# Altium PCB EnvMonitor V1.0a.PcbDoc
Units mil, origin at the board's own origin, x right, y up, seen from the top; angles counter-clockwise.
Board outline 2165.35 x 1968.5 mil, 2 copper layers (Top Layer, Bottom Layer); 164 components, 96 nets, 453 pads, 285 vias.
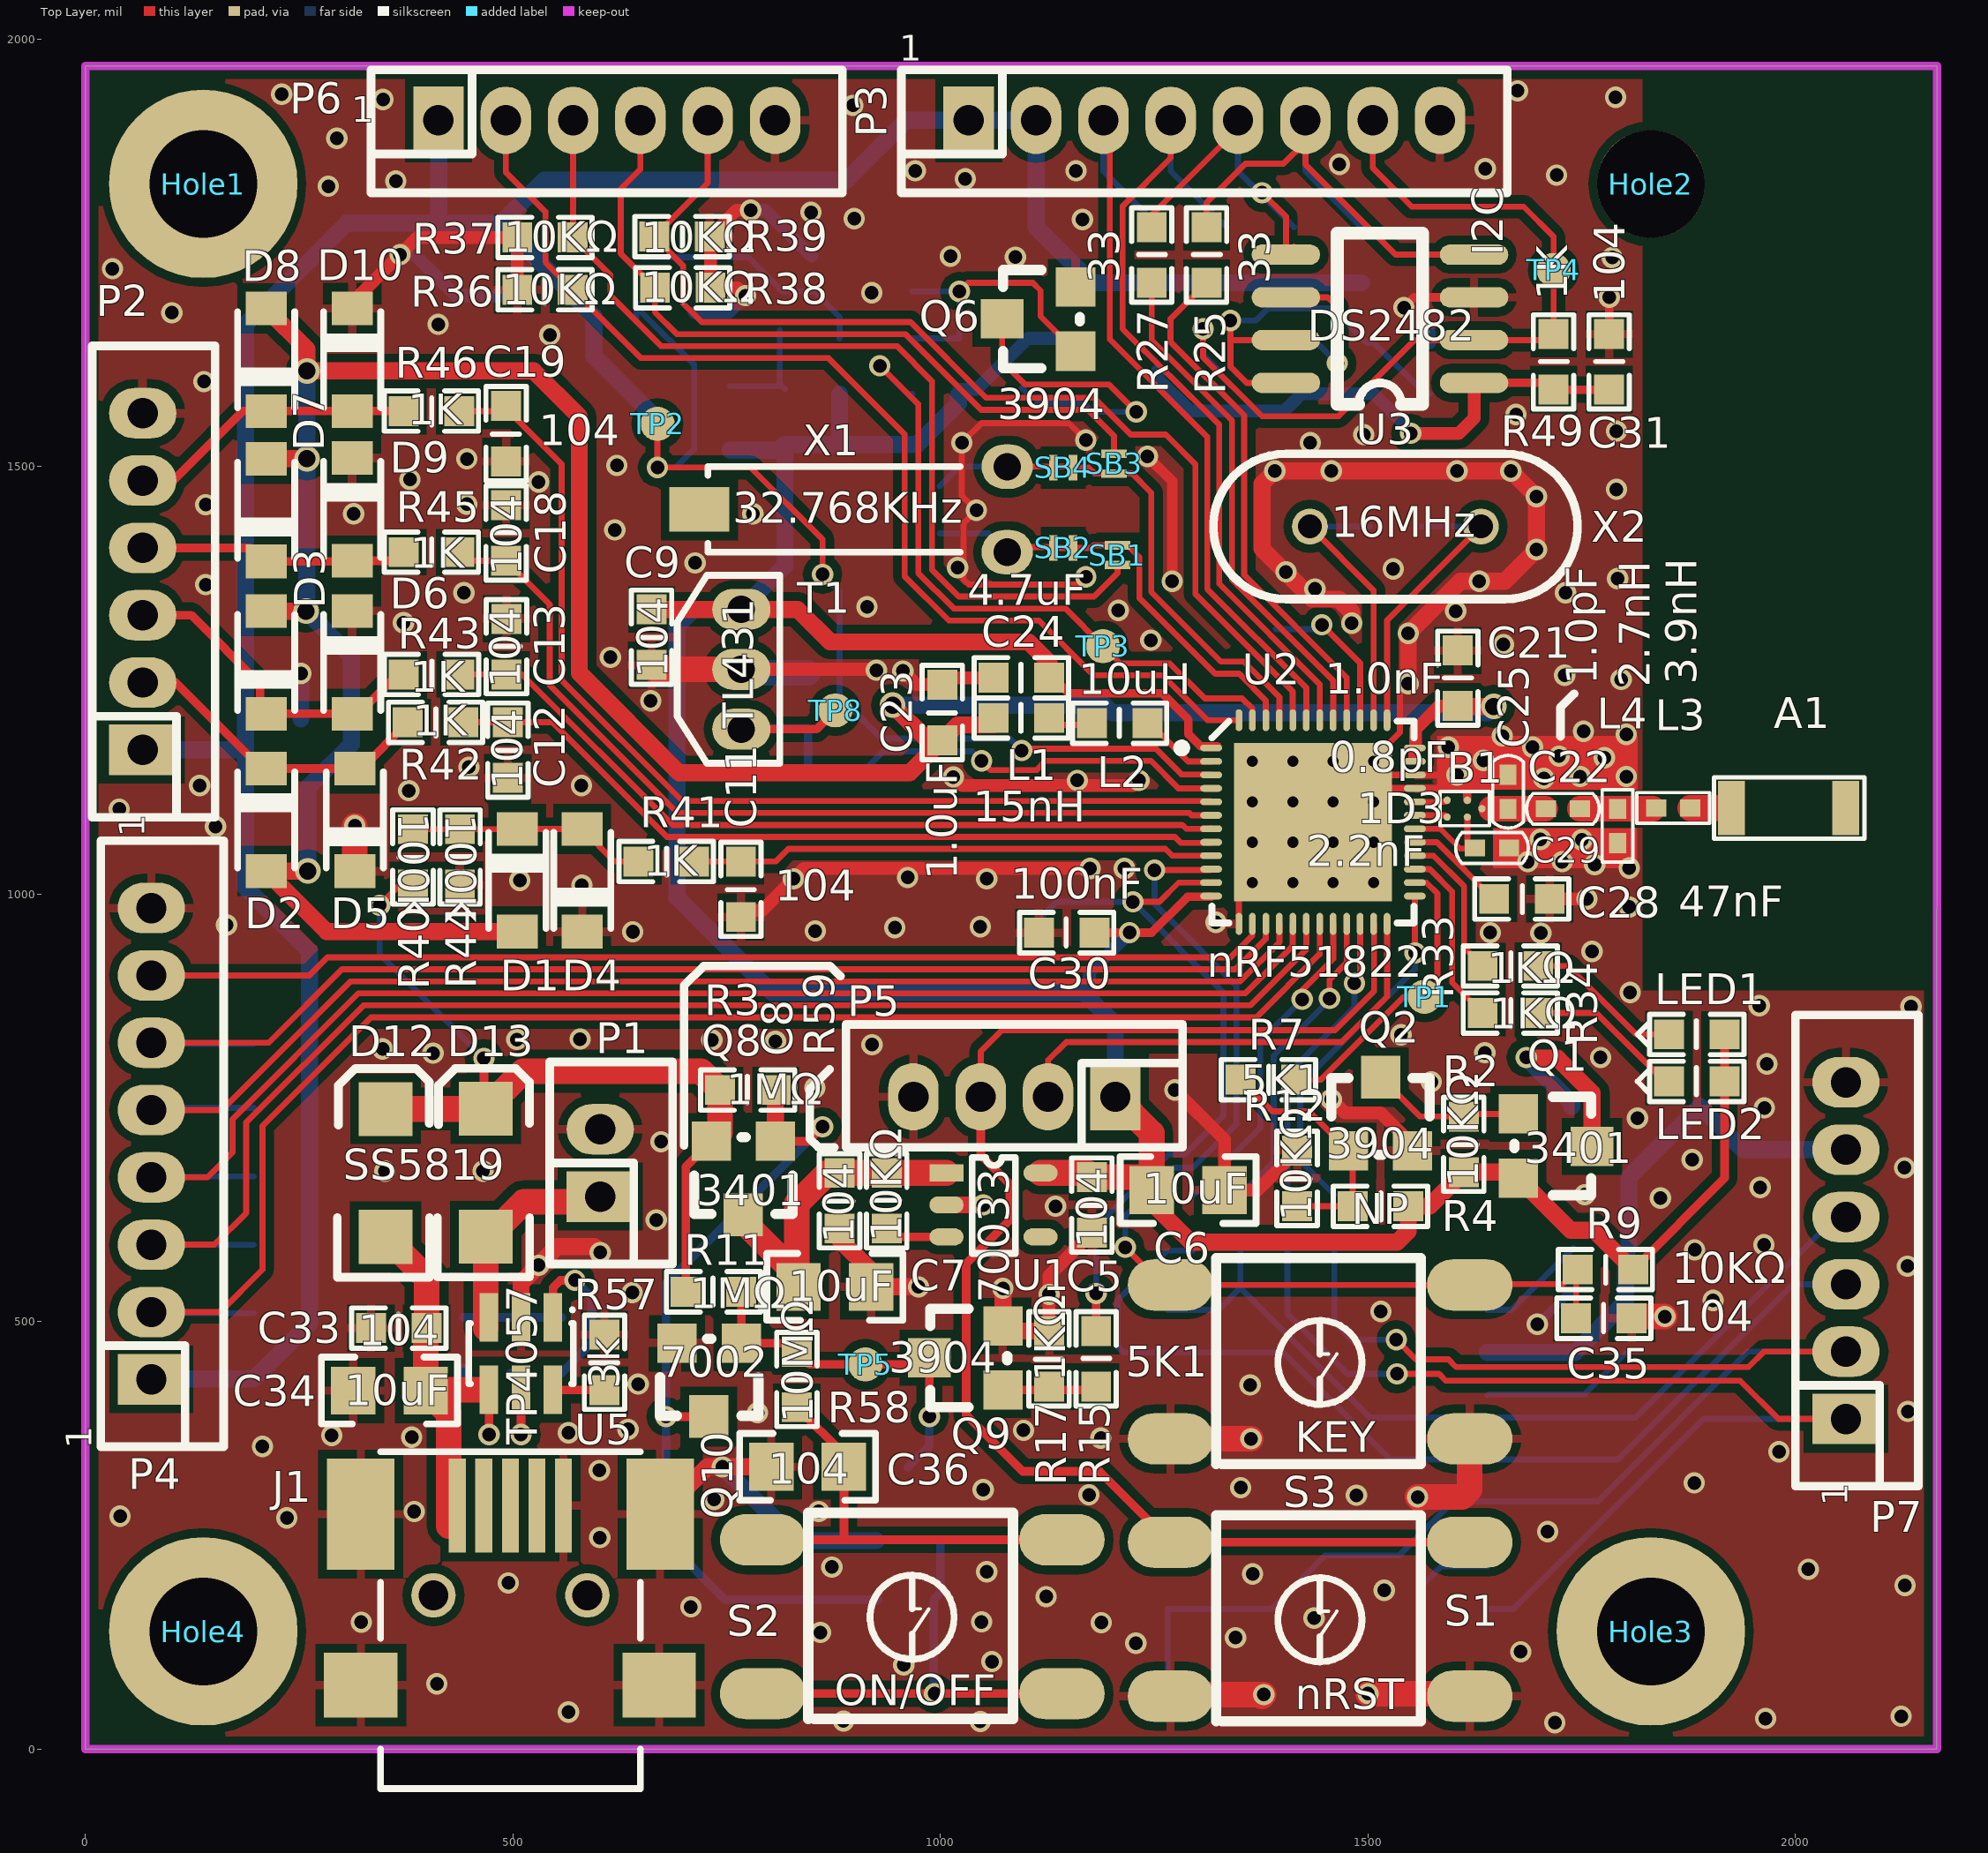
[diagram p0: Top Layer view]
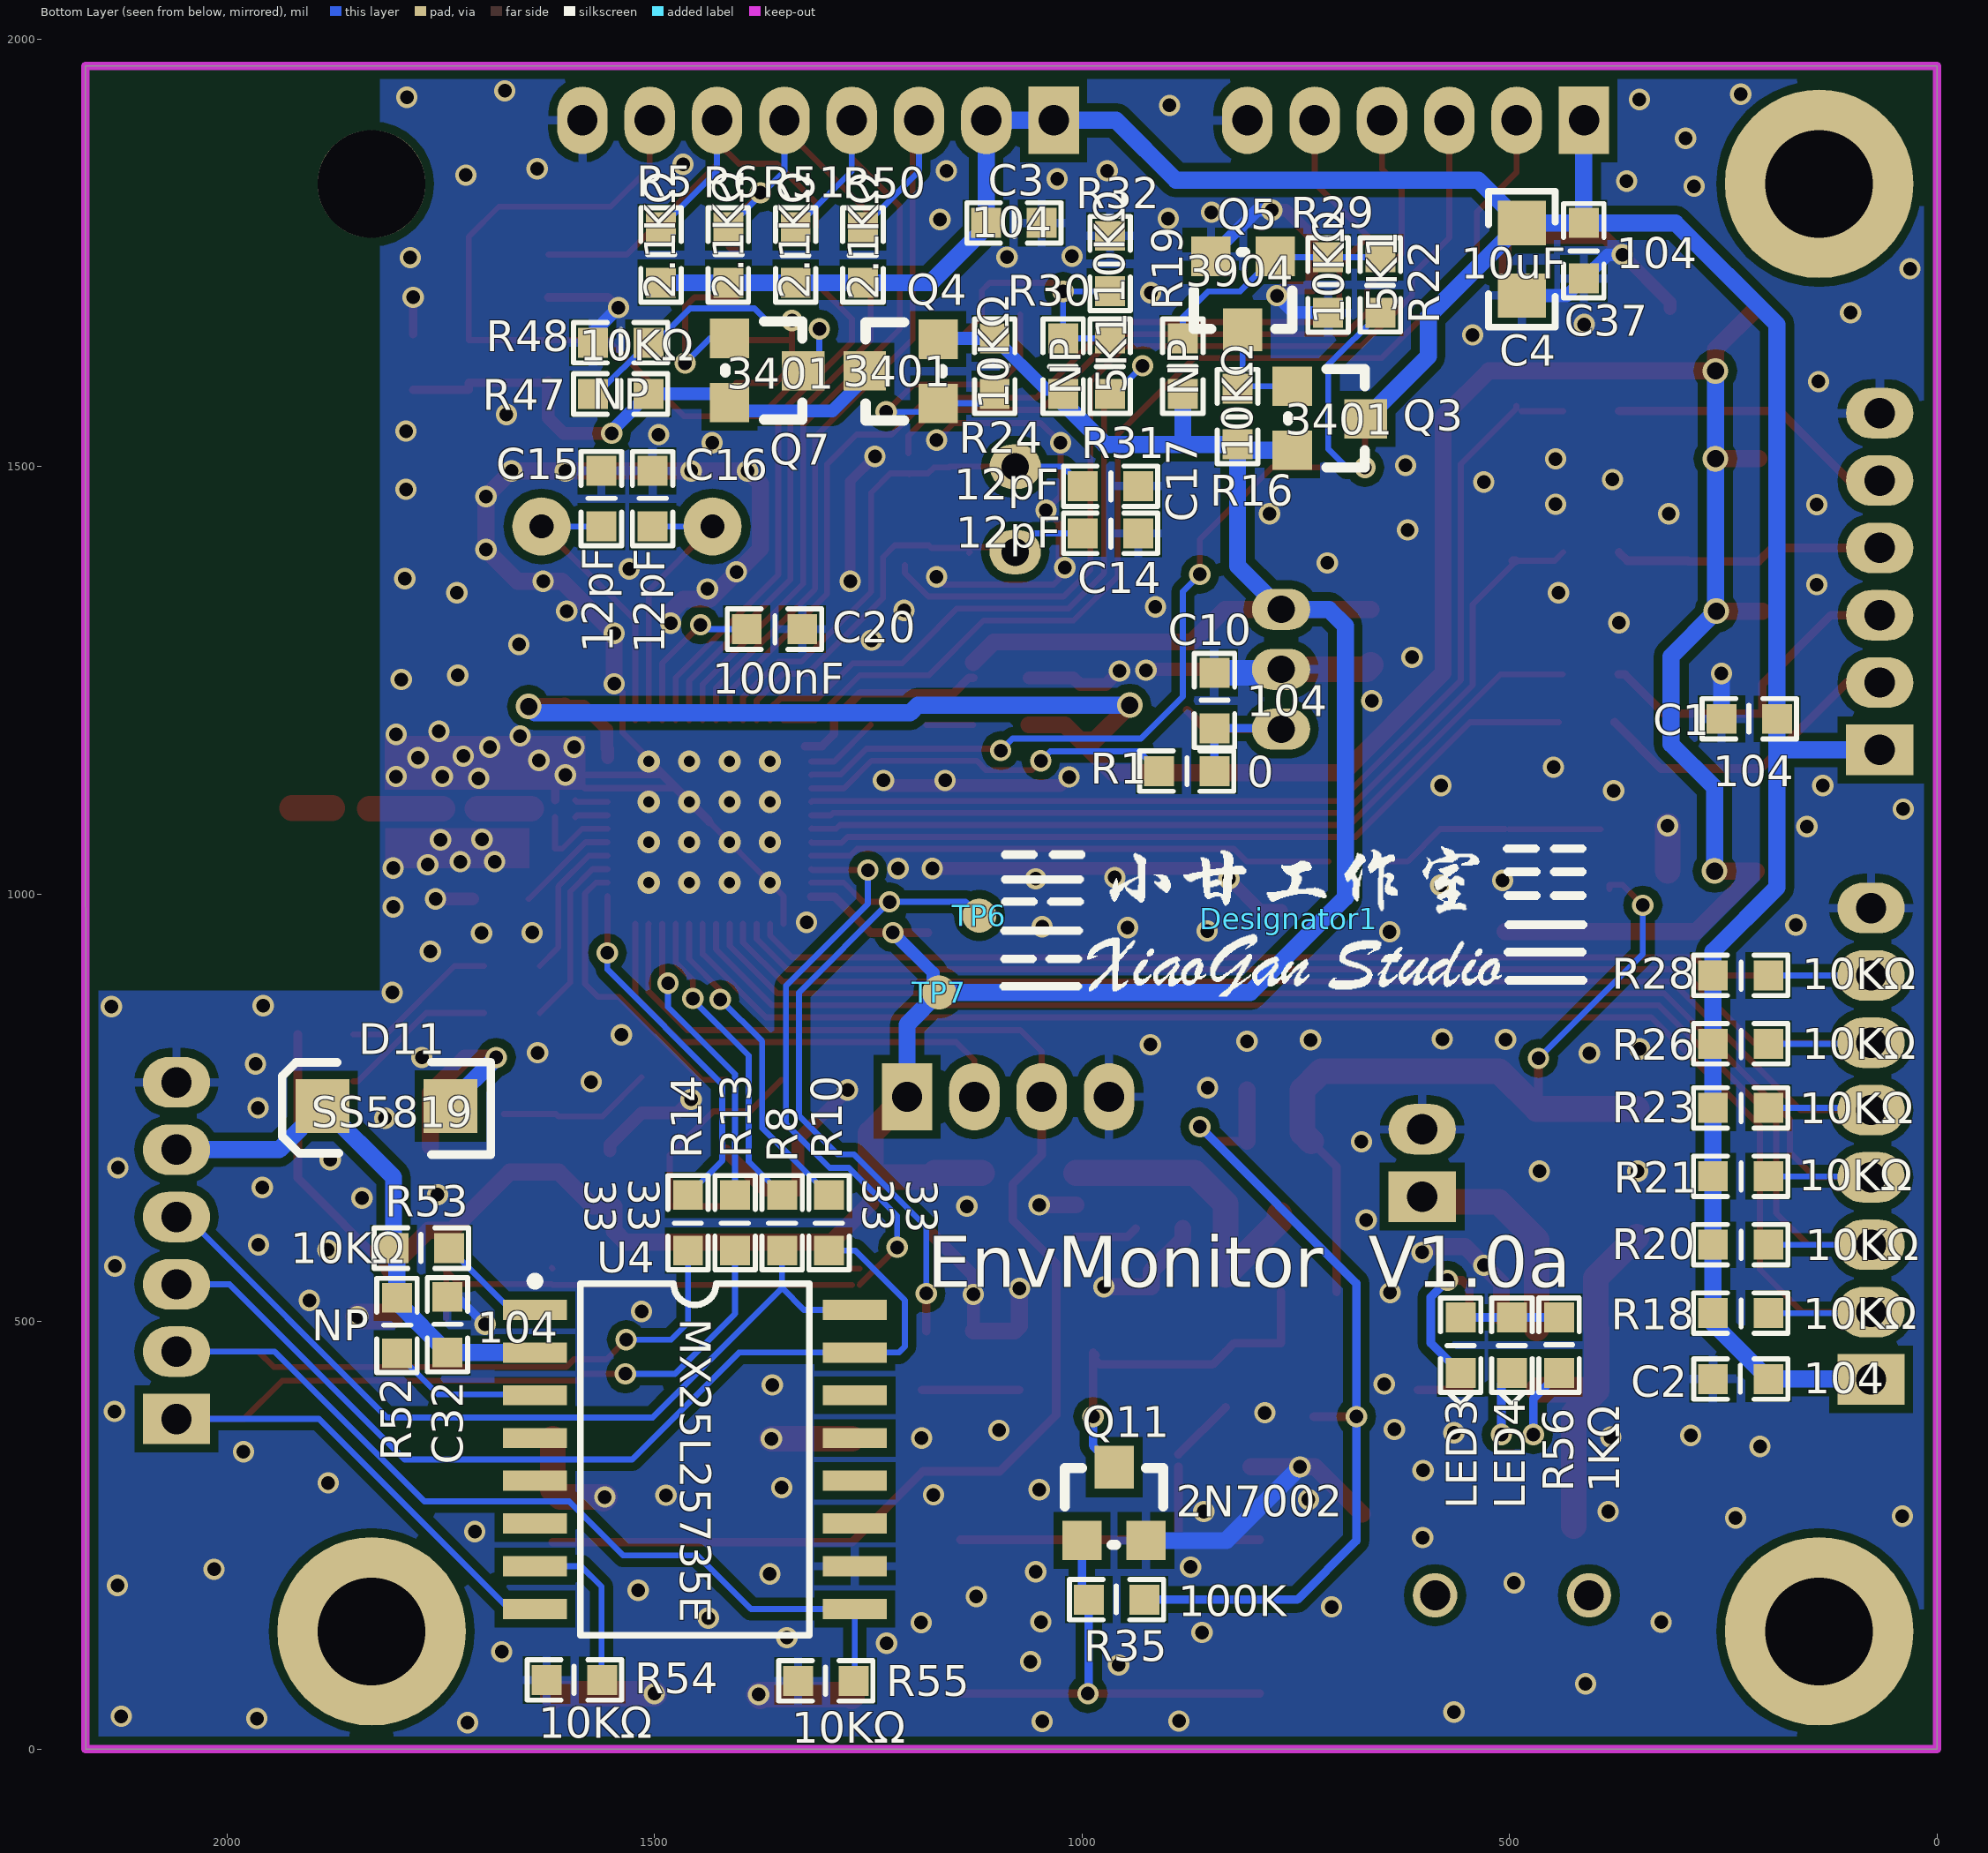
[diagram p1: Bottom Layer view, seen from below]

## Layer stack, top to bottom
Top Layer: signal copper 1.4
Dielectric: dielectric 12.6, FR-4, Dk 4.8
Bottom Layer: signal copper 1.4

## Board outline
0,0 2165,0 2165.35,1968.5 0,1968.5

## Design rules (kind name [scope] priority, off if disabled: settings)
Clearance Clearance_RF [(InNetClass('RF')) vs INPOLY] p1: gap=6
Clearance Clearance_POLY [INPOLY] p2: gap=10
Clearance Clearance_1 [All] p3: gap=7
ComponentClearance [All] p1 off: gap=10 collisioncheckmode=3 verticalgap=10 showdistances=FALSE
DiffPairsRouting [All] p1 off: maxlimit=10 minlimit=10 mostfreqgap=10 maxuncoupledlength=500
FanoutControl Fanout_BGA [IsBGA] p1 off: bgadir=Out bgaviamode=Centered fanoutstyle=Auto fanoutdirection=Alternating viagrid=1 // Fanout_BGA (Default Rule)
FanoutControl Fanout_LCC [IsLCC] p2 off: bgadir=Out bgaviamode=Centered fanoutstyle=Auto fanoutdirection=Alternating viagrid=1 // Fanout_LCC (Default Rule)
FanoutControl Fanout_SOIC [IsSOIC] p3 off: bgadir=Out bgaviamode=Centered fanoutstyle=Auto fanoutdirection=Alternating viagrid=1 // Fanout_SOIC (Default Rule)
FanoutControl Fanout_Small [(CompPinCount < 5)] p4 off: bgadir=Out bgaviamode=Centered fanoutstyle=Auto fanoutdirection=OutThenIn viagrid=1 // Fanout_Small (Default Rule)
FanoutControl Fanout_Default [All] p5 off: bgadir=Out bgaviamode=Centered fanoutstyle=Auto fanoutdirection=Alternating viagrid=1 // Fanout_Default (Default Rule)
Height [All] p1 off: minheight=0 maxheight=1000 prefheight=500
HoleSize [All] p1: absolutevalues=TRUE maxlimit=150 minlimit=1 maxpercent=80.000 minpercent=20.000
HoleToHoleClearance [All] p1 off: gap=10 allowstackedmicrovias=TRUE
MinimumSolderMaskSliver [All] p1 off: minsoldermaskwidth=10
PasteMaskExpansion [All] p1 off: expansion=0
PolygonConnect PolygonConnect_VIA [ISVIA] p1: connectstyle=Direct reliefconductorwidth=10 reliefentries=4 polygonreliefangle="90 Angle"
PolygonConnect [All] p2: connectstyle=Relief reliefconductorwidth=10 reliefentries=4 polygonreliefangle="90 Angle"
RoutingVias [All] p1: holewidth=28 width=50 viastyle="Through Hole" minholewidth=10 minwidth=10 maxholewidth=28 maxwidth=50
SilkToSilkClearance [All] p1 off: silktosilkclearance=10
SilkscreenOverComponentPads [All] p1 off: minsilkscreentomaskgap=10
SolderMaskExpansion [All] p1 off: expansion=4
Width [All] p1: maxlimit=100 minlimit=7 preferedwidth=7
14 further rules are at their usual default settings.

## Classes and differential pairs
net class RF: ANT1 ANT2 NetB1_B1 NetC22_2

## Components (designator, comment, footprint, x,y, rotation, side; value= is the part's Value field where it differs from the comment)
A1 "2450AT18A100" 3*7 2058.74,1100.75 r180 top (schematic designator ANT1)
B1 "1D3" BAL-ST-WLCSP 1592.51,1090.2 r0 top
C1 "104" 0603R 187,1205 r0 bottom
C2 "104" 0603R 197,433 r0 bottom
C3 "104" 0603R 1112,1785 r180 bottom
C4 "10uF" 0805R 485.26,1785 r270 bottom
C5 "104" 0603R 1177,669 r270 top
C6 "10uF" 0805R 1247.05,654.25 r0 top
C7 "10uF" 0805R 834,541 r0 top
C8 "104" 0603R 882,674 r270 top
C9 "104" 0603R 662,1333 r270 top
C10 "104" 0603R 845,1194 r90 bottom
C11 "104" 0603R 766.62,1038.24 r270 top
C12 "104" 0603R 494,1201 r270 top
C13 "104" 0603R 492.35,1257 r90 top
C14 "12pF" 0603R 999,1422 r180 bottom
C15 "12pF" 0603R 1562,1430 r90 bottom
C16 "12pF" 0603R 1502,1430 r90 bottom
C17 "12pF" 0603R 999,1477 r180 bottom
C18 "104" 0603R 492,1390 r90 top
C19 "104" 0603R 492,1571 r270 top
C20 "100nF" 0603R 1392,1310 r180 bottom
C21 "1.0nF" 0603R 1605,1220 r90 top
C22 "1.0pF" 0402C 1707.88,1099.75 r0 top
C23 "1.0uF" 0603R 1002,1245 r270 top
C24 "4.7uF" 0603R 1127,1253 r180 top
C25 "0.8pF" 0402C 1663.85,1139.75 r270 top (schematic designator C22)
C28 "47nF" 0603R 1647.42,994.42 r0 top
C29 "2.2nF" 0402C 1625,1054 r0 top
C30 "100nF" 0603R 1180,955 r180 top
C31 "104" 0603R 1782,1590 r90 top
C32 "104" 0603R 1742,464 r90 bottom
C33 "104" 0603R 399,492.5 r180 top
C34 "10uF" 0805R 397.95,419.24 r180 top
C35 "104" 0603R 1808.31,504 r180 top
C36 "104" 0805R 887,330 r180 top
C37 "104" 0603R 413,1785 r270 bottom
D1 "1N4148" SOD-123 505,1076.24 r270 top
D2 "1N4148" SOD-123 211.35,1147 r270 top
D3 "1N4148" SOD-123 211.35,1211 r90 top
D4 "1N4148" SOD-123 581,956.24 r90 top
D5 "1N4148" SOD-123 315,1027 r90 top
D6 "1N4148" SOD-123 312,1331 r270 top
D7 "1N4148" SOD-123 211.35,1389.2 r90 top
D8 "1N4148" SOD-123 211.35,1565 r90 top
D9 "1N4148" SOD-123 312,1510 r270 top
D10 "1N4148" SOD-123 312,1685 r270 top
D11 "SS5819" SMA 1813.2,752 r0 bottom
D12 "SS5819" SMA 351,674 r90 top
D13 "SS5819" SMA 468,674.2 r90 top
Designator1 "Comment" BMP1 758,971.5 r180 bottom
Hole1 "" HOLE-3.2#1 137.8,1830.71 r0 top
Hole2 "" HOLE-3.2#2 2027.56,1830.71 r0 top
Hole3 "" HOLE-3.2#3 2027.56,137.8 r0 top
Hole4 "" HOLE-3.2#1 137.8,137.8 r0 top
J1 "USB_COM-MicroUSB" USB_MINIB_SMT 435,285 r90 top
L1 "15nH" 0603R 1127,1206 r180 top
L2 "10uH" 0603R 1242,1200 r180 top
L3 "3.9nH" 0402R 1836.88,1100.75 r0 top
L4 "2.7nH" 0402R 1791.88,1059.75 r90 top
LED1 "LED_0603" LED-0603 1917,836 r180 top
LED2 "LED_0603" LED-0603 1917,781 r180 top
LED3 "LED-0805" LED-0603 557,505 r270 bottom
LED4 "LED-0805" LED-0603 497,505 r270 bottom
P1 "Li-BAT" CON2-2.0 602,646.26 r270 top
P2 "ADC x 4" CON6-2.0 67,1168.78 r90 top
P3 "I2C" CON8-2.0 1033,1905 r180 top locked
P4 "IO" CON8-2.0 77,432.56 r270 top
P5 "SWD" CON4-2.0 1204.48,763 r0 top locked
P6 "IO" CON6-2.0 412.82,1905 r0 top locked
P7 "Flash" CON6-2.0 2058.86,386.26 r90 top
Q1 "3401" SOT-23 1676,743 r270 top
Q2 "3904" SOT-23 1477,700 r0 top
Q3 "3401" SOT-23 754,1594 r270 bottom
Q4 "3401" SOT-23 1168,1574 r90 bottom
Q5 "3904" SOT-23 774,1746 r0 bottom
Q6 "3904" SOT-23 1158,1635 r90 top
Q7 "3401" SOT-23 1412,1650 r270 bottom
Q8 "3401" SOT-23 807,711 r180 top
Q9 "3904" SOT-23 1073,420 r90 top
Q10 "7002" SOT-23 767,475 r180 top
Q11 "2N7002" SOT-23 1000,244 r180 bottom
R1 "0" 0603R 910,1144 r180 bottom
R2 "10KΩ" 0603R 1612,740 r270 top
R3 "1MΩ" 0603R 807,771 r180 top
R4 "NP" 0603R 1482,635 r0 top
R5 "2.1KΩ" 0603R 1492.25,1715.01 r90 bottom
R6 "2.1KΩ" 0603R 1413.5,1715.01 r90 bottom
R7 "5K1" 0603R 1351,783 r0 top
R8 "33" 0603R 1350.62,648.24 r270 bottom
R9 "10KΩ" 0603R 1745,561 r0 top
R10 "33" 0603R 1295.62,648.24 r270 bottom
R11 "1MΩ" 0603R 767,535 r180 top
R12 "10KΩ" 0603R 1417,700 r270 top
R13 "33" 0603R 1405.62,648.24 r270 bottom
R14 "33" 0603R 1460.62,648.24 r270 bottom
R15 "5K1" 0603R 1182,424 r90 top
R16 "10KΩ" 0603R 818,1591 r270 bottom
R17 "1KΩ" 0603R 1127,489 r270 top
R18 "10KΩ" 0603R 262,510 r180 bottom
R19 "NP" 0603R 882,1650 r270 bottom
R20 "10KΩ" 0603R 262,590 r180 bottom
R21 "10KΩ" 0603R 262,670 r180 bottom
R22 "5K1" 0603R 651,1745 r270 bottom
R23 "10KΩ" 0603R 262,750 r180 bottom
R24 "10KΩ" 0603R 1102,1585 r90 bottom
R25 "33" 0603R 1311.13,1715 r90 top
R26 "10KΩ" 0603R 262,825 r180 bottom
R27 "33" 0603R 1247,1715 r90 top
R28 "10KΩ" 0603R 262,905 r180 bottom
R29 "10KΩ" 0603R 712,1680 r90 bottom
R30 "NP" 0603R 1022,1650 r270 bottom
R31 "5K1" 0603R 967,1650 r270 bottom
R32 "10KΩ" 0603R 967,1770 r270 bottom
R33 "1KΩ" 0603R 1634,916 r0 top
R34 "1KΩ" 0603R 1634,861 r0 top
R35 "100K" 0603R 927,175 r0 bottom
R36 "10KΩ" 0603R 570,1706.9 r180 top
R37 "10KΩ" 0603R 570,1768 r180 top
R38 "10KΩ" 0603R 666,1709.26 r0 top
R39 "10KΩ" 0603R 665.26,1769 r0 top
R40 "100K" 0603R 383,1076 r270 top
R41 "1K" 0603R 646.62,1038.24 r0 top
R42 "1K" 0603R 377,1201 r0 top
R43 "1K" 0603R 372.35,1257 r0 top
R44 "100K" 0603R 438,1011 r90 top
R45 "1K" 0603R 372,1400 r0 top
R46 "1K" 0603R 372,1565 r0 top
R47 "NP" 0603R 1572,1585 r180 bottom
R48 "10KΩ" 0603R 1572,1645 r180 bottom
R49 "1K" 0603R 1717,1590 r90 top
R50 "2.1KΩ" 0603R 1256,1780 r270 bottom
R51 "2.1KΩ" 0603R 1334.75,1780 r270 bottom
R52 "NP" 0603R 1801,463 r90 bottom
R53 "10KΩ" 0603R 1740,586 r0 bottom
R54 "10KΩ" 0603R 1561,81 r0 bottom
R55 "10KΩ" 0603R 1267,80 r0 bottom
R56 "1KΩ" 0603R 442,440 r90 bottom
R57 "3k" 0603R 607,485 r270 top
R58 "10MΩ" 0603R 832,465 r270 top
R59 "10KΩ" 0603R 937,609 r90 top
S1 "nRST" KEY-6S 1444,152 r0 top locked
S2 "ON/OFF" KEY-6S 967,155 r0 top
S3 "KEY" KEY-6S 1444,453 r0 top
SB1 "Solderbridge" SOLDERBRIDGE 1207,1408 r270 top (schematic designator SB3)
SB2 "Solderbridge" SOLDERBRIDGE_SHORTED 1132,1405 r0 top net-tie (schematic designator SB4)
SB3 "Solderbridge" SOLDERBRIDGE 1203,1492 r90 top
SB4 "Solderbridge" SOLDERBRIDGE_SHORTED 1132,1499 r0 top net-tie
T1 "TL431" TL-431 767,1333 r0 top
TP1 "" MARKER-C#1 1566,880 r0 top
TP2 "" MARKER-C#1 669,1550 r0 top
TP3 "" MARKER-C#1 1190,1290 r0 top
TP4 "" MARKER-C#1 1717,1730 r90 top
TP5 "" MARKER-C#1 912,450 r270 top
TP6 "" MARKER-C#2 1120,975 r270 bottom
TP7 "" MARKER-C#2 1167,885 r180 bottom
TP8 "" MARKER-C#1 877,1215 r90 top
U1 "70033" SOT-23-5 1007,674 r0 top
U2 "nRF51822" QFN40P600X600X90-48N 1435.62,1084.38 r0 top locked
U3 "DS2482" SO-8 1624,1598 r180 top
U4 "MX25L25735E" SOIC16W 1453,339.47 r270 bottom
U5 "TP4057" SOT23-6 509.4,462.68 r0 top
X1 "32.768KHz" CRY-32 1078,1500 r180 top
X2 "16MHz" XTAL-D 1432,1430 r0 top

## Footprints (in the part's own frame and the unit in brackets; to place one, negate y for a bottom-side part, rotate by r counter-clockwise, add the part's x,y. Pads: shape width x height; smd on the part's side, far side on the other; paste and mask are expansions set on the pad)
3*7 [mm]
  rect 0.8x1.6 smd: 1(0,0) 2(3.4,0)
  silkscreen extent -0.56,-0.91 3.91,0.91
0402C [mm]
  rect 0.6x0.5 smd: 1(0,0) 2(1.016,0)
  silkscreen extent -0.57,-0.46 1.59,0.46
0402R [mm]
  rect 0.6x0.5 smd: 1(0,0) 2(1.016,0)
  silkscreen extent -0.57,-0.46 1.59,0.46
0603R [mil]
  rect 35x35 smd: 1(0,0) 2(65,0)
  silkscreen extent -23,-24 88,24
0805R [mil]
  rect 52x56 smd: 1(-0.05,-0.25) 2(84.95,-0.25)
  silkscreen extent -37,-39 122,39
BAL-ST-WLCSP [mm]
  round 0.22 smd mask+0.05: A2(0.6,0.5) A3(0,0.5) B1(1.033,0.25) C2(0.6,0) C3(0,0)
  Top Layer pour cut-out: -0.19,-0.23 1.256,-0.23 1.256,0.737 -0.19,0.737
  silkscreen extent -0.22,-0.26 1.26,0.75, body extent -0.2,-0.23 1.26,0.74, height 0.63
BMP1 [mil]
  silkscreen extent -338,-91 349,86
CON2-2.0 [mm]
  rect 1.5x2 hole 0.9: 1(0,0)
  oval 1.5x2 hole 0.9: 2(-2,0)
  silkscreen extent -4,-1.5 2,2.15, body extent -4,-1.55 2,2.1, height 5.55
CON4-2.0 [mm]
  rect 1.5x2 hole 0.9: 1(0,0)
  oval 1.5x2 hole 0.9: 2(-2,0) 3(-4,0) 4(-6,0)
  silkscreen extent -8,-1.5 2,2.15, body extent -8,-1.53 2,2.12, height 5.55
CON6-2.0 [mm]
  rect 1.5x2 hole 0.9: 1(0,0)
  oval 1.5x2 hole 0.9: 2(2,0) 3(4,0) 4(6,0) 5(8,0) 6(10,0)
  silkscreen extent -2,-2.15 12,1.5, body extent -2,-2.2 12,1.5, height 5.55
CON8-2.0 [mm]
  rect 1.5x2 hole 0.9: 1(0,0)
  oval 1.5x2 hole 0.9: 2(-2,0) 3(-4,0) 4(-6,0) 5(-8,0) 6(-10,0) 7(-12,0) 8(-14,0)
  silkscreen extent -16,-1.5 2,2.15, body extent -16,-1.45 2,2.2, height 5.55
CRY-32 [mil]
  rect 70x52 smd: 0(360,50)
  oval 60x52 hole 32: 1(0,0) 2(0,100)
  silkscreen extent 55,0 350,100
HOLE-3.2#1 [mm]
  round 5.6 hole 3.2: 1(0,0)
HOLE-3.2#2 [mm]
  round 3.2 hole 3.2 unplated: 1(-5,0)
HOLE-3.2#3 [mm]
  round 5.6 hole 3.2: 1(-5,0)
KEY-6S [mil]
  oval 100x60 smd: 1(-175,-90) 1(175,-90) 2(-175,90) 2(175,90)
  silkscreen extent -122,-119 118,121
LED-0603 [mil] "140705"
  rect 35x35 smd: 1(0,0) 2(65,0)
  silkscreen extent -23,-24 102,24
MARKER-C#1 [mil]
  round 40 smd: 0(0,0)
  round 80 on Top Solder: 0(0,0)
MARKER-C#2 [mil]
  round 40 smd: 0(0,0)
  round 80 on Bottom Solder: 0(0,0)
QFN40P600X600X90-48N [mm] "QFN, 48-Leads, Body 6,0x6,0mm (max), Pitch 0,40mm, IPC Medium Density"
  oval 0.65x0.2 smd: 1(-3.025,2.2) 2(-3.025,1.8) 3(-3.025,1.4) 4(-3.025,1) 5(-3.025,0.6) 6(-3.025,0.2) 7(-3.025,-0.2) 8(-3.025,-0.6) 9(-3.025,-1) 10(-3.025,-1.4) 11(-3.025,-1.8) 12(-3.025,-2.2) 25(3.025,-2.2) 26(3.025,-1.8) 27(3.025,-1.4) 28(3.025,-1) 29(3.025,-0.6) 30(3.025,-0.2) 31(3.025,0.2) 32(3.025,0.6) 33(3.025,1) 34(3.025,1.4) 35(3.025,1.8) 36(3.025,2.2)
  oval 0.2x0.65 smd: 13(-2.2,-3.025) 14(-1.8,-3.025) 15(-1.4,-3.025) 16(-1,-3.025) 17(-0.6,-3.025) 18(-0.2,-3.025) 19(0.2,-3.025) 20(0.6,-3.025) 21(1,-3.025) 22(1.4,-3.025) 23(1.8,-3.025) 24(2.2,-3.025) 37(2.2,3.025) 38(1.8,3.025) 39(1.4,3.025) 40(1,3.025) 41(0.6,3.025) 42(0.2,3.025) 43(-0.2,3.025) 44(-0.6,3.025) 45(-1,3.025) 46(-1.4,3.025) 47(-1.8,3.025) 48(-2.2,3.025)
  rect 4.7x4.7 smd: 49(0,0)
  silkscreen extent -4.02,-3 3,3, body extent -3,-3 3,3, height 0.9
SMA [mm]
  rect 1.6x1.6 smd: 1(-1.9,0) 2(1.9,0)
  silkscreen extent -3.1,-1.31 3.1,1.44, body extent -2.29,-1.27 2.31,1.43, height 2.4
SO-8 [mil]
  oval 80x24 smd: 1(0,0) 2(0,-50) 3(0,-100) 4(0,-150) 5(220,-150) 6(220,-100) 7(220,-50) 8(220,0)
  silkscreen extent 60,-175 160,25
SOD-123 [mm]
  rect 1x1.22 smd: 1(0,0) 2(3.048,0)
  silkscreen extent 0.1,-0.85 2.95,0.85
SOIC16W [mm]
  rect 0.6x1.9 smd: 1(-4.431,-4.741) 2(-3.161,-4.741) 3(-1.891,-4.741) 4(-0.621,-4.741) 5(0.649,-4.741) 6(1.919,-4.741) 7(3.189,-4.741) 8(4.459,-4.741) 9(4.459,4.759) 10(3.189,4.759) 11(1.919,4.759) 12(0.649,4.759) 13(-0.621,4.759) 14(-1.891,4.759) 15(-3.161,4.759) 16(-4.431,4.759)
  silkscreen extent -5.41,-4.87 5.24,3.41
SOLDERBRIDGE [mil]
  rect 10x30 smd paste-393.7: 1(0,0) 2(23,0)
SOLDERBRIDGE_SHORTED [mil]
  rect 10x30 smd paste-393.7: 1(0,0) 2(23,0)
SOT23-6 [mm]
  rect 0.55x1.45 smd: 1(0.95,1.075) 2(0,1.075) 3(-0.95,1.075) 4(-0.95,-1.075) 5(0,-1.075) 6(0.95,-1.075)
  silkscreen extent -1.55,-0.9 1.58,1.35
SOT-23 [mil]
  rect 46x46 smd: 1(0,0) 2(75,0)
  rect 46x50 smd: 3(38,86)
  silkscreen extent -20,-5 95,85
SOT-23-5 [mil]
  rect 40x20 smd: 1(0,0)
  oval 40x20 smd: 2(0,-37.4) 3(0,-74.8) 4(110,-74.8) 5(110,0)
  silkscreen extent 30,-94 81,18
TL-431 [mil]
  oval 68x48 hole 32: 1(0,-140) 2(0,-70) 3(0,0)
  silkscreen extent -75,-180 45,40
USB_MINIB_SMT [mil]
  round 52 hole 35: 0(-105,28) 0(-105,-152)
  rect 110x20 smd: 1(0,0) 2(0,-31) 3(0,-62) 4(0,-93) 5(0,-124)
  rect 130x79 smd: 6(-10,113) 7(-10,-237)
  rect 76x86 smd: 8(-210,113) 9(-210,-236)
  silkscreen extent -331,-214 63,90
XTAL-D [mil]
  round 42 / inner round 68 / far side round 68 hole 28: 1(0,0) 2(200,0)
  silkscreen extent -113,-85 313,85

## Part data
A1 L3 L4: library part L0402-3n3, "Inductor, 190mA, ?.1nH"
B1: library part BAL-NRF02D3, "50 ohm balun transformer for 2.45GHz ISM"
C1 C2 C3 C4 C5 C6 C7 C8 C9 C10 C11 C12 C13 C18 C19 C31 C32 C33 C34 C35 C36 C37: library part CAP, "贴片"
C14 C15 C16 C17: library part C0402-12p, "Capacitor, NP0, ?%"
C20 C30: library part C0402-100n, "Capacitor, X7R, ?0%"
C21: library part C0402-1n0, "Capacitor, X7R, ?0%"
C22 C25: library part C0402-0.8p, "Capacitor, NP0, ?%"
C23: library part C0603-1?, "Capacitor, X7R, ?0%"
C24: library part C0603-4?, "Capacitor, X5R, ?0%"
C28: library part C0402-47n, "Capacitor, X7R, ?0%"
C29: library part C0402-2n2, "Capacitor, X7R, ?0%"
D1 D2 D3 D4 D5 D6 D7 D8 D9 D10: library part DIODE, "ÌùÆ"
D11 D12 D13: library part "Diode 1N914", "ÌùÆ"
Hole1 Hole2 Hole3 Hole4 TP1 TP2 TP3 TP4 TP5 TP6 TP7 TP8: library part TESTPOINT, "Test Point"
J1: library part USB_COM-MiniUSB
L1: library part L0402-15n, "Inductor, 320mA, ?%"
L2: library part L0603-10?, "Inductor, 80mA, ?0%"
LED1 LED2: "LED_0603 Typical RED, GREEN, YELLOW, AMBER GaAs LED"
LED3 LED4: library part LED_0603, "LED_0603 Typical RED, GREEN, YELLOW, AMBER GaAs LED"
P1: library part "Header 2", "Header, 2-Pin"
P2 P6 P7: library part "Header 6", "Header, 6-Pin"
P3 P4: library part "Header 8", "Header, 8-Pin"
P5: library part "Header 4", "Header, 4-Pin"
Q1 Q3 Q4 Q7 Q8: library part DMP3098L, "-30V,-3.8A   PMOS  70-120mΩ"
Q2 Q5 Q6 Q9: library part 9013, "NPN三?"
Q10 Q11: library part MOSFET-N, "N-Channel MOSFET"
R1 R2 R3 R4 R5 R6 R7 R8 R9 R10 R11 R12 R13 R14 R15 R16 R17 R18 R19 R20 R21 R22 R23 R24 R25 R26 R27 R28 R29 R30 R31 R32 R33 R34 R35 R36 R37 R38 R39 R40 R41 R42 R43 R44 R45 R46 R47 R48 R49 R50 R51 R52 R53 R54 R55 R56 R58 R59: library part RES_0603
R57: library part Res1, "ÌùÆ"
S1 S2 S3: library part SW-PB
SB2 SB4: library part "Solderbridge Shorted", "Shorted Solderbridge"
U1: library part AZ1084
U2: "Multi-protocol Bluetooth Low Energy and 2.4GHz proprietary system-on-chip"
U4: "SPI_flash"
U5: "锂电"
X1 X2: library part "XTAL_FC-135 32.768k", "EPSON TOYOCOM - FC-135 32.768KHZ ?0PPM,9.0PF - CRYSTAL, SM, WATCH"

## Via types
v1: diameter 25, hole 16, Top Layer to Bottom Layer, tented both sides, 263 vias
v2: diameter 25.98, hole 12.99, Top Layer to Bottom Layer, 16 vias
v3: diameter 30, hole 20, Top Layer to Bottom Layer, tented both sides, 6 vias

## Nets (pads, with @x,y where several pads share a name; then routed paths per layer and width w, separated by ;. In a path a pad name is that pad's centre, name@x,y a point inside that pad or via, vN(x,y) a via of type N, cw(c..) or ccw(c..) an arc to the next point about the centre after c; other vN are vias at no path point)
AIN1: C19.1 R46.2 U2.5 | length 1215.1
  Top Layer w7: R46.2 C19.1@486,1565 ; C19.1 492,1568 557,1503 557,1250.29 698.29,1109 1315.53,1109 U2.5
AIN2: C18.1 R45.2 U2.6 | length 1066.4
  Top Layer w7: R45.2 447,1390 C18.1 543,1339 543,1244.49 692.49,1095 1291,1095 1293.75,1092.25 U2.6
  Top Layer w10: C18.1 C18.1@496,1390
AIN3: C13.1 R43.2 U2.7 | length 954.6
  Top Layer w7: R43.2 C13.1 510.69,1257 686.69,1081 1283,1081 1287.5,1076.5 U2.7 U2.7@1316.03,1077
AIN4: C12.1 R42.2 U2.8 | length 933.2
  Top Layer w7: R42.2 C12.1 546,1201 680,1067 1274,1067 1281,1060 1315.77,1060 U2.8
AIN5: C11.1 R41.2 U2.9 | length 614.3
  Top Layer w7: R41.2 C11.1 807.24,1038.24 822,1053 1263,1053 1270.99,1045.01 U2.9
ANT1: B1.C3 U2.31 | length 38.7
  Top Layer w7: U2.31 1590.26,1092.25 B1.C3@1592.51,1090
ANT2: B1.A3 U2.32 | length 38.5
  Top Layer w7: U2.32 1590.83,1108 B1.A3@1592.51,1109.68
AVDD: C21.1 C23.2 D1.2 D2.2 D3.2 D7.2 D8.2 L1.2 U2.35 U2.36 | length 3315
  Top Layer w12: U2.36@1554.72,1169.72 U2.36@1555.35,1170.29
  Top Layer w15: 1554.72,1159.5 1554.72,1169.72 1555.35,1170.35 1555.35,1192.35 1583,1220 C21.1 ; v3@1646.5,1220 v3(1647,1219.5)
  Top Layer w20: D3.2@204.35,1331 D3.2 v3(258,1331) ; D7.2@208.35,1509.2 D7.2 v3(259,1509.2) ; D8.2 259,1637.35 v3(259,1612) 524,1612 577.5,1558.5 577.5,1258.78 694.28,1142 964,1142 C23.2 ; v3(260,1027) D2.2 282.11,956.24 D1.2 ; v3(944,1221) 985,1180 C23.2 ; L1.2@1062,1198 1020,1198 C23.2 ; C21.1 1605.5,1219.5 v3(1647,1219.5)
  Bottom Layer w20: v3(258,1331) 311,1278 311,1175.57 260,1124.57 v3(260,1027) ; v3@259,1332 v3(259,1509.2) v3(259,1612) ; v3(944,1221) 1192,1221 1201,1212 1639.5,1212 v3(1647,1219.5)
DEC1: C20.1 U2.39 | length 177.1
  Top Layer w7: v1(1446,1315) 1490.74,1270.26 U2.39
  Bottom Layer w7: C20.1 v1@1439,1310
DEC2: C28.1 U2.29 | length 120.2
  Top Layer w7: U2.29 1580.4,1060.76 1646.73,994.42 C28.1
GND: B1.A2 C1.2 C2.2 C3.2 C4.2 C5.2 C6.2 C7.2 C8.2 C9.2 C10.2 C11.2 C12.2 C13.2 C14.2 C15.2 C16.2 C17.2 C18.2 C19.2 C20.2 C21.2 C23.1 C24.2 C25.1 C28.2 C29.2 C30.2 C31.2 C32.2 C33.2 C34.2 C35.1 C36.2 C37.2 D4.1 D5.1 D6.1 D9.1 D10.1 J1.5 J1.6 J1.7 J1.8 J1.9 L4.1 P1.2 P2.6 P3.8 P4.8 P5.4 P6.6 P7.6 Q2.2 Q5.2 Q6.2 Q9.2 Q10.2 Q11.2 R12.1 R17.1 R29.1 R32.1 R36.2 R37.2 R38.2 R39.2 R44.1 R48.1 R54.2 R55.2 R57.1 S1.1 S3.1 T1.2 U1.2 U2.13 U2.33 U2.34 U2.49 U3.3 U4.10 U5.2 | length 6378.5
  Top Layer w7: v1(1170,1371) 1161,1362 1033,1362 1027,1368 1027,1434 v1(1042,1449) 1025,1466 v1(1025,1528) 1048,1551 1150,1551 v1(1170,1531) ; U2.13 1349.01,997.76 v2(1364.76,1013.51) U2.49 1435.62,1087.58 1537.35,1189.32 1537.35,1236.35 v1(1547,1246) ; v1(1603.96,1139.5) 1607.5,1139.5 1612.46,1144.46 1612.46,1147.25 v1@1611.72,1147.25
  Top Layer w7.8: U2.49@1474.99,1123.75 U2.33 1581.25,1123.75 v1@1594,1136.5 ; U2.49@1490.74,1139.5 U2.34 v1(1603.96,1139.5)
  Top Layer w10: U2.49 1474.99,1123.75 U2.49@1490.74,1139.5 ; v1(1542,1686) 1554,1698 U3.3 ; v1(1603.96,1139.5) v1@1611.72,1147.25 ; B1.A2@1616,1109.89 1616,1142.97 v1@1611.72,1147.25 ; C25.1@1663.85,1140.75 1657.35,1147.25 v1@1611.72,1147.25 ; C31.2 v1(1782,1698)
  Top Layer w12: v1(1242,1512) 1271,1483 v1(1271,1366)
  Top Layer w15: D10.1 312,1692 v1(368,1748) 388,1768 R37.2 R36.2 ; C11.2@766.62,981.24 791.24,981.24 v1(827.94,1017.94) 840,1030 v1(1175,1030) ; T1.2 923.87,1263 v1(925.01,1261.87) ; v1(772,1700) 762.74,1709.26 R38.2 731,1768.26 R39.2 761.26,1800 v1(778,1800) ; v1(956,1261) 972,1245 C23.1 1010,1253 C24.2 ; v1(1015,1137) 1025,1127 1226,1127 v1(1232,1133) ; R17.1 v1(1127,532) 1127,554 C5.2 ; v1(1274,771) 1332,713 C6.2 1371,654 R12.1 ; v1(1457,760) 1473,744 1515,744 1552,707 Q2.2 ; C28.2 1755.92,994.42 v1(1756,994.5)
  Top Layer w20: U5.2 509.4,545.4 v1(530,566) 552,588 595,588 v1(602,581) ; J1.7 727.25,330.25 v1(745,330.25) C36.2 ; C8.2 882,596 918.95,559.05 C7.2 v1(974.25,540.75) ; U1.2 v1(1050,636.6) ; v1(1073,539) Q9.2 1079,489 R17.1 ; v1(1481,1317) 1481,1329.99 1466,1344.99 1435.01,1344.99 1376,1404 1376,1480 v1(1391,1495) v1(1457,1495) v1(1604,1495) v1(1667,1495) v1(1697,1465) v1(1697,1403) 1660,1366 v1(1630,1366) 1608,1366 v1(1547,1305) v1(1547,1246)
  Top Layer w30: D5.1 v1(315,1080) ; C9.2 667,1263 T1.2 ; S1.1@1269,62 1271,64 v1(1378,64) v1@1376,62 ; S3.1@1269,363 v1(1363,363) ; v1(1500,65) 1616,65 S1.1@1619,62 ; v1@1560,293 v1(1558,295) 1610,295 1619,304 S3.1@1619,363 ; C35.1@1808.31,506 v1(1847,506)
  Bottom Layer w10: v1(1698,497) 1730,529 C32.2
  Bottom Layer w15: v1(368,1748) 385,1748 C37.2 432.95,1700.05 C4.2 ; R29.1 752,1680 v1(772,1700) ; v1(778,1800) 795,1800 Q5.2 ; v1(1542,1686) 1572,1656 R48.1
  Bottom Layer w20: C1.2 v1(252,1258) ; v1(745,330.25) 831.25,244 Q11.2
  Bottom Layer w30: T1.2 771,1259 C10.2
  other v1: 1718.5,31 1046.5,32.5 886.5,33 1965,36 2123.5,38.5 565,43.5 411,76.5 957,98.5 1060,102.5 1678.5,114 1228.5,124 1345,130.5 859.5,136.5 322.5,148.5 1188,148 1048,149 1437,153.5 708,166.5 1123.5,178.5 1519,186 2128,191.5 494.5,194.5 1365,205 1054,207.5 2015,210.5 873,213 601.5,247.5 1710,254.5 235.5,270.5 40.5,272.5 384.5,278 857.5,278 735,292 1486.5,297 1173.5,297.5 1050,303.5 1351,306 1881.5,311.5 601,326 1980.5,348 207,354 1187.5,364 381.5,365 288,367 565,370 1097,373 634.5,374 786,393.5 2131.5,395 1362,426 646.5,427 1515,512 1903.5,525 639.5,534 2131,565 1882,584 1963,590 667.5,619 1134.5,635 1842,644.5 1753.5,648.5 1958.5,657 350,676 465,676 2127.5,680 1879,689.5 673,710.5 1815,738 1963.5,750 853,773.5 1574,780.5 1966.5,801.5 1772,809 406.5,814 1636.5,814.5 347.5,819 920,824 807,828 504.5,830 578.5,830.5 732.5,829.5 1538.5,835.5 2135,868.5 1957.5,869.5 1806.5,885 1762,933 1702,954.5 1643,955 640,956 853.5,957 946.5,961 1046.5,962 165,964 1322,967 1805.5,985 580.5,1010.5 508,1016 1054,1018 961.5,1019.5 1215,1030 1805.5,1030.5 1765,1034.5 1686.81,1037.94 1727,1038 1701.5,1064 1750,1063.5 152,1079 39.5,1099.5 378,1121 133.5,1127 580,1127 1160,1133 1705.5,1135.5 1748,1137.5 1802,1137.5 448.5,1148.5 1635,1156.5 1776.5,1159.5 1723.5,1161.5 1594,1172 1692.5,1172 1657,1185 1802,1187 1752,1190.5 661,1226 1796,1251 1730,1256 614,1277 1658.5,1292 1246,1297 372,1317.5 1602.5,1331 1208,1332 914,1336 442.5,1352.5 1731,1352.5 1438,1357 140.5,1362 1792,1369 1404,1377 1529.5,1380.5 1020,1382 713,1387.5 619,1426 313.5,1445 780.5,1445 140.5,1455.5 446,1456 1790.5,1473.5 530,1482 379.5,1485 621.5,1501.5 446,1509 1432.5,1528 1495,1537.5 1790.5,1541.5 1673,1561 138.5,1599.5 543,1654 412.5,1666.5 101,1680 919.5,1703.5 31.5,1731.5 1785.5,1744.5 1087.5,1745 1011.5,1746 1166,1789 899,1790 848.5,1797.5 284,1828 363,1834 1029,1836.5 1720.5,1841 970.5,1846 1158.5,1846 1637,1848.5 1466.5,1853.5 294,1884 897.5,1922.5 348,1929.5 1789.5,1932 229.5,1935.5 1675,1939.5
  other v2: 1412,1013.51 1459.24,1013.51 1506.49,1013.51 1364.76,1060.76 1412,1060.76 1459.24,1060.76 1506.49,1060.76 1364.76,1108 1412,1108 1459.24,1108 1506.49,1108 1364.76,1155.24 1412,1155.24 1459.24,1155.24 1506.49,1155.24
IO_1WIRE: P3.7 Q7.3 R49.2 TP4.0@1717,1730 U3.2 | length 986.7
  Top Layer w7: v1(1307,1661) 1307,1628 1375.99,1559.01 1465.39,1559.01 1554.39,1648 U3.2 1717,1648 R49.2 1717,1730 1717,1769 1682,1804 1551,1804 1505.44,1849.56 P3.7
  Bottom Layer w7: v1(1307,1661) 1307,1631 Q7.3
NetANT1_2: A1.2 L3.2 | length 48.4
  Top Layer w10: A1.2@1923.88,1100.75 A1.2@1924.88,1101.75
  Top Layer w30: L3.2 A1.2@1923.88,1100.75
NetB1_B1: B1.B1 C22.1 C25.2 | length 64.6
  Top Layer w7: C25.2@1663.15,1100.04 C25.2@1663.85,1100.75 ; C22.1@1706.88,1099.75 C22.1@1707.88,1100.75
  Top Layer w30: 1644,1100.04 C25.2@1663.15,1100.04 ; C25.2 C22.1@1706.88,1099.75
NetC7_1: C7.1 C8.1 Q8.3 R59.2 U1.1 | length 369.6
  Top Layer w30: Q8.3 769,617.69 832,554.69 832,638 868,674 C8.1 R59.2 U1.1
NetC14_1: C14.1 SB2.1 X1.2 | length 165.5
  Top Layer w7: X1.2@1078,1406 SB2.1@1131,1406 ; SB2.1@1131,1400 SB2.1@1132,1399 ; SB2.1 1155,1405
  Bottom Layer w7: C14.1 1056,1422 X1.2
NetC17_1: C17.1 SB4.1 X1.1 | length 166.9
  Top Layer w7: X1.1 SB4.1@1131,1500 ; SB4.1 SB4.1@1131,1500 ; 1155,1500 SB4.1@1131,1500
  Bottom Layer w7: C17.1 1022,1500 X1.1
NetC22_2: C22.2 L3.1 L4.2 | length 82.5
  Top Layer w7: L4.2@1787.88,1099.75 L4.2@1788.88,1100.75
  Top Layer w30: C22.2 L4.2@1787.88,1099.75 ; L4.2 L3.1@1833,1099.75
NetC36_1: C36.1 R58.2 S2.2 | length 513.5
  Top Layer w10: S2.2@792,245 888,245 ; R58.2 C36.1@887.05,344.95 ; C36.1 887.05,245.95 888,245 ; S2.2@1142,245 888,245
NetD1_1: D1.1 D4.2 R40.1 R41.1 R44.2 | length 264.7
  Top Layer w7: R40.1@393,1076 R44.2 D1.1@500.38,1076 ; D1.1 D4.2 619,1038.24 R41.1
NetD13_1: D13.1 P1.1 U5.3 | length 255.9
  Top Layer w30: U5.3@468,492 468,595.39 512.61,640 P1.1@602,640
NetL1_1: L1.1 L2.2 | length 55
  Top Layer w7: L1.1@1127,1198 L2.2@1182,1198
NetL2_1: L2.1 U2.2 | length 87.2
  Top Layer w7: L2.1@1247,1198 1289.76,1155.24 U2.2
NetLED1_2: LED1.2 R33.2 | length 186.1
  Top Layer w7: R33.2 1734,916 1814,836 LED1.2
NetLED2_2: LED2.2 R34.2 | length 186.1
  Top Layer w7: R34.2 1767,861 1847,781 LED2.2
NetLED3_1: LED3.1 LED4.1 R56.2 | length 115
  Bottom Layer w10: R56.2 LED4.1 LED3.1
NetLED3_2: LED3.2 U5.1 | length 195
  Top Layer w10: U5.1 546.8,539.8 555.4,548.4 v1(572.4,548.4)
  Bottom Layer w10: LED3.2 592,475 592,528.8 v1(572.4,548.4)
NetLED4_2: LED4.2 U5.5 | length 129.5
  Top Layer w10: v1(509.4,368) U5.5
  Bottom Layer w10: LED4.2 509.4,427.6 v1(509.4,368)
NetQ1_1: Q1.1 Q2.3 R2.1 | length 181.3
  Top Layer w7: Q2.3 1561,740 R2.1 1615,743 Q1.1
NetQ2_1: Q2.1 R4.1 R7.1 R12.2 | length 292.5
  Top Layer w7: R7.1 1388,746 1431,746 Q2.1 1482,695 R4.1 R12.2
NetQ3_1: Q3.1 Q5.3 R16.1 | length 128.2
  Bottom Layer w7: Q3.1 815,1594 R16.1 ; R16.1@812,1597 Q5.3
NetQ4_1: Q4.1 Q6.3 R24.1 | length 366.5
  Top Layer w7: Q6.3@1072,1678 Q6.3 1072,1623 1099,1596 1197,1596 v1(1229,1564)
  Bottom Layer w7: R24.1@1095,1592 R24.1 ; R24.1@1113,1574 Q4.1 1178,1564 v1(1229,1564)
NetQ5_1: Q5.1 R19.1 R22.1 R29.2 | length 285
  Bottom Layer w7: R22.1 R29.2 775,1745 815,1705 852,1705 882,1675 R19.1
NetQ6_1: Q6.1 R30.1 R31.1 R32.2 | length 355.9
  Top Layer w7: v1(1022,1705) 1032,1715 1108,1715 1117,1706 1117,1676 Q6.1
  Bottom Layer w7: R31.1 R30.1 v1(1022,1705) R32.2
NetQ7_1: Q7.1 U3.6 | length 194.6
  Top Layer w7: U3.6 1453,1698 1464,1687 v1(1464,1621)
  Bottom Layer w7: Q7.1 1435,1650 v1(1464,1621)
NetQ8_1: Q8.1 Q10.3 R3.1 R35.1 | length 1011.3
  Top Layer w10: v1(679,389) Q10.3 ; Q8.1 845,711 v1(862,728)
  Top Layer w20: Q8.1 R3.1
  Bottom Layer w10: v1@680,390 v1(679,389) ; v1(862,728) 679,545 v1(679,389) ; R35.1@926,174 R35.1 748,175 679,244 v1(679,389)
NetQ9_1: Q9.1 R15.1 R17.2 | length 114
  Top Layer w10: Q9.1 R15.1@1187,420
NetQ9_3: Q9.3 Q10.1 Q11.3 R11.1 R58.1 TP5.0@912,450 | length 442.3
  Top Layer w10: R11.1 Q10.1 822,475 R58.1 847,450 912,450 979,450 Q9.3 ; Q9.3@984,461 987,464 Q9.3 ; v1(987,389) Q9.3
  Bottom Layer w10: Q11.3 987,355 v1(987,389)
NetQ11_1: Q11.1 R35.2 S2.1 | length 532.3
  Top Layer w10: S2.1@792,65 v1(993,65) S2.1@1142,65
  Bottom Layer w10: v1@992,65 R35.2 1000,183 Q11.1
NetR47_1: R47.1 R48.2 U3.7 U3.8 | length 472.5
  Top Layer w7: v1(1339,1671) 1339,1649 ; U3.8 1358,1598 1339,1617 1339,1649 ; U3.7 1340,1648 1339,1649
  Bottom Layer w7: v1(1339,1671) 1369,1671 1383,1685 1458.27,1685 1498.27,1645 R48.2 1567,1585 R47.1
NetR52_1: R52.1 U4.3 | length 181.7
  Bottom Layer w7: U4.3 1640.72,415 1753,415 R52.1
NetR53_1: R53.1 U4.1 | length 130.2
  Bottom Layer w7: U4.1 1667.93,513.93 R53.1
NetR54_1: R54.1 U4.7 | length 197.2
  Bottom Layer w7: R54.1 1561.68,81.68 1561.68,190 1585.61,213.93 U4.7
NetR57_2: R57.2 U5.6 | length 60.3
  Top Layer w10: U5.6 547.16,420 R57.2
NetR59_1: R59.1 U1.3 | length 74.1
  Top Layer w10: R59.1 946.8,599.2 U1.3
NSFLASH_WP: P7.2 R14.2 R55.1 U4.9 | length 1718.1
  Top Layer w7: v1@1536,482 v1(1533,479) 1556,456 1594,456 1603,447 1945,447 1963,465 P7.2
  Bottom Layer w7: R55.1 1265.64,81.36 U4.9 1386.93,163.93 1449.62,226.62 1536.13,226.62 1599.51,290 1769,290 1944,465 P7.2 ; R14.2 1460.62,499 1480.62,479 v1(1533,479)
P0.00/VREF0: R1.1 U2.4 | length 443.1
  Top Layer w7: v1(1048,1156) 1059,1145 1112,1145 1123,1156 1246,1156 1278.25,1123.75 U2.4
  Bottom Layer w7: R1.1 933,1167 1037,1167 v1(1048,1156)
P0.01: D2.1 D5.2 P2.2 R42.1 | length 374
  Top Layer w10: P2.2 105.48,1247.52 206,1147 D2.1 D5.2 323,1147 R42.1
P0.02: D3.1 D6.2 P2.3 R43.1 | length 392.4
  Top Layer w10: P2.3 123.74,1326.26 204.35,1245.65 204.35,1211 D3.1 D6.2 319,1211 365,1257 R43.1
P0.03: D7.1 D9.2 P2.4 R45.1 | length 316
  Top Layer w10: P2.4 192.55,1405 208.35,1389.2 D7.1 290.55,1389.2 291.35,1390 D9.2 362,1390 R45.1
P0.04: D8.1 D10.2 P2.5 R46.1 | length 338.7
  Top Layer w10: P2.5 102.74,1483.74 184,1565 D8.1 D10.2 R46.1
P0.05: D12.2 D13.2 Q8.2 R3.2 R11.2 R40.2 | length 1028.2
  Top Layer w7: v1(344,987) 368,1011 R40.2 R40.2@383,1006
  Top Layer w10: v1(466,808) 466,751 D13.2 ; R11.2 702,681 Q8.2 ; Q8.2@725,718 Q8.2@732,725
  Top Layer w20: D13.2@468,748.8 471.8,748.8 D13.2@472,749
  Top Layer w30: D12.2 D13.2@468,748.8 ; D13.2 512,793 720,793 R3.2 742,721 Q8.2
  Bottom Layer w7: v1(344,987) 344,930 v1(466,808)
P0.06: C35.2 R9.1 S3.2 U2.10 | length 1224.4
  Top Layer w7: v1(1216,587) S3.2@1260,543 ; v1(1250.37,1028.16) 1315.43,1028.16 U2.10 ; S3.2@1260,562 S3.2@1269,562 ; S3.2@1269,543 S3.2@1619,543 ; S3.2@1619,562 S3.2@1620,563 ; S3.2@1620,544 1728,544 R9.1@1743.31,559.32 ; C35.2 R9.1@1743.31,559.32 ; R9.1 R9.1@1743.31,559.32
  Bottom Layer w7: v1(1216,587) 1216,623.47 1272.53,680 1295,680 1346,731 1346,893 1250.37,988.63 v1(1250.37,1028.16)
P0.07: R15.2 TP6.0@1120,975 U2.11 | length 831.2
  Top Layer w7: v1(1225,991) 1256,991 1278.51,1013.51 U2.11
  Top Layer w10: R15.2 v1(1182,533)
  Bottom Layer w7: TP6.0@1120,975 1136,991 v1(1225,991) 1331,885 1331,741 1285.77,695.77 1266.77,695.77 1182,611 v1(1182,533)
P0.08: P4.7 R28.2 U2.14 | length 1442.1
  Top Layer w7: P4.7@78,904 P4.7 261.94,905 283,926.06 1339.06,926.06 1364.76,951.76 U2.14
  Bottom Layer w7: P4.7 R28.2
P0.09: P4.6 R26.2 U2.15 | length 1491.9
  Top Layer w7: P4.6 214.26,826.26 300.06,912.06 1344.86,912.06 1380.5,947.71 U2.15
  Bottom Layer w7: P4.6 78.26,825 R26.2
P0.10: P4.5 R23.2 U2.16 | length 1543.2
  Top Layer w7: P4.5 159.52,747.52 310.06,898.06 1350.66,898.06 1396.25,943.65 U2.16
  Bottom Layer w7: P4.5 79.48,750 R23.2
P0.11: P4.4 R21.2 U2.17 | length 1616.2
  Top Layer w7: P4.4@77,668.86 P4.4 142.78,668.78 172,698 172,736.8 319.26,884.06 1356.46,884.06 1412,939.6 U2.17
  Bottom Layer w7: P4.4 78.22,670 R21.2
P0.12: P4.3 R20.2 U2.18 | length 1705.7
  Top Layer w7: P4.3 151.04,590.04 188,627 188,733 325.06,870.06 1362.25,870.06 1427.75,935.55 U2.18
  Bottom Layer w7: P4.3 P4.3 R20.2
P0.13: P4.2 R18.2 U2.19 | length 1794.5
  Top Layer w7: P4.2 157.3,511.3 207,561 207,729 334,856 1369.47,856 1442.97,929.5 1443.5,929.5 U2.19
  Bottom Layer w7: P4.2 78.3,510 R18.2
P0.14: R10.1 U2.20 | length 385.6
  Top Layer w7: v1(1423,877) 1422,878 1422,887 1459.24,924.24 U2.20
  Bottom Layer w7: R10.1 1373.85,726.47 1373.85,827.85 v1(1423,877)
P0.15: R8.1 U2.21 | length 368.6
  Top Layer w7: v1(1455,878) 1455,900 1474.99,919.99 U2.21
  Bottom Layer w7: R8.1 1389.78,687.4 1389.78,811.26 1455,876.47 v1(1455,878)
P0.16: R13.1 U2.22 | length 352.3
  Top Layer w7: v1(1484,896) 1490.74,902.74 U2.22
  Bottom Layer w7: R13.1 1405.62,789.62 1484,868 v1(1484,896)
P0.17: R14.1 U2.25 | length 421.9
  Top Layer w7: U2.25 1554.72,931.61 v1(1555,931.33)
  Bottom Layer w7: R14.1 1420.62,688.24 1420.62,777.62 1555,912 v1(1555,931.33)
P0.18: R7.2 TP1.0@1566,880 U2.26 | length 348.7
  Top Layer w7: R7.2 1445,783 1542,880 1566,880 1581,895 1581,1000.76 1568.24,1013.51 U2.26
P0.19: R34.1 U2.27 | length 211.4
  Top Layer w7: U2.27 1572.29,1029.26 1598.42,1003.14 1598.42,896.58 R34.1
P0.20: R33.1 U2.28 | length 174.5
  Top Layer w7: U2.28 1576.35,1045.01 1612.42,1008.93 1612.42,937.58 R33.1
P0.21: R25.1 U2.40 | length 614.3
  Top Layer w7: R25.1 1269,1672.87 1269,1646 1355,1560 1355,1373.47 1474.99,1253.48 U2.40
P0.22: R27.1 U2.41 | length 599.4
  Top Layer w7: R27.1 1247,1647.77 1341,1553.77 1341,1367.67 1459.24,1249.43 U2.41
P0.23: P3.4 R51.1 U2.42 | length 972.7
  Top Layer w7: P3.4 1269.22,1861.22 1213,1805 1213,1661 1322,1552.97 1326,1548.97 1326,1362.88 1443.5,1245.38 U2.42
  Bottom Layer w7: P3.4 1269.22,1845.53 R51.1
P0.24: P3.3 R50.1 U2.43 | length 951.9
  Top Layer w7: P3.3 1198,1897.48 1198,1649 1312,1535 1312,1357.08 1427.75,1241.33 U2.43
  Bottom Layer w7: P3.3 1190.48,1845.52 R50.1
P0.25: P6.5 R39.1 U2.44 | length 1277.5
  Top Layer w7: P6.5 727.78,1831.52 R39.1 699,1735.26 699,1691 721,1669 965,1669 1053.5,1580.5 1179.5,1580.5 1222.47,1537.53 1263.53,1537.53 1298,1503.06 1298,1351.28 1412,1237.28 U2.44
P0.26: P6.4 R38.1 SB3.2 | length 867.9
  Top Layer w7: P6.4 649.04,1848.04 626,1825 626,1749.26 R38.1 666,1680.6 691.6,1655 959,1655 1047.5,1566.5 1172.5,1566.5 1203,1536 SB3.2@1203,1515.47
P0.27: P6.3 R37.1 SB1.2 | length 1112.2
  Top Layer w7: P6.3 570.3,1768.3 R37.1 614,1724 614,1700 673,1641 949,1641 990,1600 990,1379.47 1021.47,1348 1179.53,1348 1207,1375.47 SB1.2
P0.28: R31.2 TP3.0@1190,1290 U2.47 | length 782.6
  Top Layer w7: v1(929,1618) 974,1573 974,1375.67 1015.67,1334 1146,1334 1190,1290 1210,1270 1268,1270 1309,1229 1352.76,1229 1364.76,1217 U2.47
  Bottom Layer w7: v1(929,1618) 962,1585 R31.2
P0.29: P6.2 R36.1 U2.48 | length 1315.4
  Top Layer w7: P6.2 491.56,1844.44 538,1798 538,1738.9 R36.1 649.9,1627 869,1627 958,1538 958,1371.88 1009.88,1320 1115,1320 1179,1256 1259.89,1256 1312.42,1203.47 U2.48
P0.30: R22.2 TP2.0@669,1550 U2.3 | length 1189.6
  Top Layer w7: TP2.0@669,1550 v1(669,1499) 778,1499 862,1415 v1(862,1374) ; v1@1106,1170 1251.8,1170 1281.8,1140 1316.02,1140 U2.3
  Bottom Layer w7: R22.2@644.26,1669.74 R22.2@644.26,1691.62 ; R22.2 712,1619 712,1521 690,1499 v1@671.02,1499 ; v1(862,1374) 882,1354 882,1231 931,1182 1081,1182 v1(1095,1168)
SCL_1WIRE: P3.6 R5.2 R25.2 U3.4 | length 618.5
  Top Layer w7: R25.2 1311.13,1808.71 1356.63,1854.21 1401.21,1854.21 P3.6@1426.7,1879.7 ; P3.6 P3.6@1426.7,1879.7 ; U3.4 1531.96,1748 1426.7,1853.26 P3.6@1426.7,1879.7
  Bottom Layer w7: P3.6 1426.7,1845.56 R5.2
SDA_1WIRE: P3.5 R6.2 R27.2 U3.5 | length 416
  Top Layer w7: R27.2 1247,1794.35 1347.96,1895.31 P3.5 ; v1(1376,1820.35) 1404,1792.35 U3.5 U3.5@1413.22,1757.22
  Bottom Layer w7: P3.5 1347.96,1845.55 R6.2
SFLASH_MISO: P7.1 R13.2 U4.8 | length 1289.4
  Top Layer w7: v1(1534,439) 1583,439 1591,431 1935,431 1979.74,386.26 P7.1
  Bottom Layer w7: R13.2 1405.62,509.38 1476,439 v1(1534,439) ; U4.8 1669.93,163.93 1892.26,386.26 P7.1
SFLASH_MOSI: P7.3 R10.2 U4.15 | length 1158.1
  Bottom Layer w7: R10.2 1265.24,583.24 1207,525 1207,471 1214.07,463.93 U4.15 1401.1,463.93 1526.03,339 1792.03,339 1996.77,543.74 P7.3
SFLASH_SCK: P7.4 R8.2 U4.16 | length 1007.5
  Bottom Layer w7: U4.16 1325.17,513.93 1350.62,539.38 ; R8.2 1350.62,539.38 ; P7.4 2047.31,622.48 1812.83,388 1502,388 1350.62,539.38
SWCLK: P5.2 U2.24 | length 548.1
  Top Layer w7: P5.2@1125.74,770 1125.74,805.74 1147,827 1468.97,827 1522.24,880.27 U2.24
SWDIO: P5.3 S1.2 U2.23 | length 1672.1
  Top Layer w7: P5.3@1047,770 1047,816 1072,841 1461.53,841 1507,886.47 1507,964.77 U2.23
  Top Layer w10: P5.3 1047,695 1081,661 1081,619 1030,568 1030,391 1096,325 1186,325 1269,242 S1.2@1619,242
VDD_1WIRE: C31.1 Q4.3 Q7.2 R47.2 R49.1 U3.1 | length 638.3
  Top Layer w10: U3.1 1717,1598 R49.1 C31.1
  Top Layer w15: v1(1550,1539) 1606,1539 1624,1557 U3.1
  Bottom Layer w15: Q4.3 1254,1603 1292,1565 1402,1565 Q7.2 1422,1585 R47.2 1550,1542 v1(1550,1539)
VDD_3V3: C5.1 C6.1 C9.1 C24.1 C30.1 LED1.1 LED2.1 P5.1 Q1.2 Q3.2 Q4.2 R2.2 R4.2 R9.2 R16.2 R19.2 R24.2 R30.2 T1.3 TP7.0@1167,885 U1.5 U2.1 U2.12 | length 4058.3
  Top Layer w10: C24.1 1131.97,1253 1149.97,1235 1258.97,1235 1290,1203.97 1290,1187 1304,1173 U2.1@1324,1173 ; C30.1 v1(1221,955) 1247,955 1289,997 U2.12@1316.53,997 ; R9.2 1917,668 LED2.1 LED1.1
  Top Layer w20: C9.1 T1.3 833,1333 871,1295 1103,1295 1127,1271 ; C6.1@1247,669 C6.1 1247,639 1293,593 1534,593 1547,606 R4.2 1572,635 R2.2 1669,675 1737,607 1764,607 R9.2
  Top Layer w30: U1.5 1172,674 C5.1 1247,669 1247,720.48 P5.1
  Bottom Layer w7: R24.2 R24.2@1103,1649
  Bottom Layer w15: R30.2@1022,1590.36 1042.36,1590.36 R24.2 1167,1650 Q4.2 ; 1115,885 1116,886 ; TP7.0@1167,885 1174,892 1174,908 v1(1221,955)
  Bottom Layer w20: Q3.2 811,1519 R16.2 ; R19.2 882,1527 883,1526 ; R30.2 1021,1584 1021,1574 973,1526 883,1526 ; P5.1 1204.48,847.52 1167,885 1115,885 803,885 692,996 692,1314 711,1333 T1.3 818,1384 R16.2 ; R16.2 883,1526
VDD_BUS: C33.1 C34.1 D12.1 J1.1 R56.1 U5.4 | length 584.7
  Top Layer w10: v1(472,368) U5.4
  Top Layer w30: D12.1 399,551.2 C33.1 398,491.5 C34.1@398,427.5 ; C34.1@402,423.5 C34.1@398,427.5 ; J1.1@425,261 425,392.5 C34.1 ; U5.4@466,420.35 398.86,420.35 C34.1 ; C34.1 C34.1@398,427.5
  Bottom Layer w10: R56.1 472,410 v1(472,368) ; R56.1@442,446 R56.1@445,443
VDD_CON: C1.1 C2.1 C3.1 C4.1 C37.1 P2.1 P3.1 P3.2 P4.1 P6.1 Q3.3 R5.1 R6.1 R18.1 R20.1 R21.1 R23.1 R26.1 R28.1 R50.2 R51.2 | length 3512.2
  Bottom Layer w20: P2.1 187,1168.78 ; P4.1 77.44,433 C2.1 262,498 R18.1 R20.1 R21.1 R23.1 R26.1 R28.1 262,933 187,1008 187,1168.78 ; P6.1 413,1904.82 C37.1 ; C4.1 486.49,1785.05 536.43,1835 890,1835 960,1905 P3.1 P3.2 1112,1904.74 C3.1 1112,1780 1177,1715 R50.2 R51.2 R6.1 1484.75,1715.01 R5.1 ; Q3.3 595,1629 595,1675.57 486,1784.57 486,1785 C37.1 ; 187,1168.78 C1.1 187,1666.18 305.82,1785 C37.1
VDD_FLASH: D11.1 Q1.3 | length 235.9
  Top Layer w20: v1(1685,809) 1686,808 1721.68,808 1762,767.68 Q1.3
  Bottom Layer w20: v1(1685,809) 1738.39,755.61 D11.1
VDD_PA: B1.C2 C29.1 U2.30 | length 108
  Top Layer w7: U2.30 1584.45,1076.5 1607.7,1053.25 C29.1@1616.12,1053.25 ; C29.1@1616.13,1053.27 B1.C2
VDD_VREF: C10.1 R1.2 T1.1 TP8.0@877,1215 | length 251.2
  Top Layer w10: T1.1 855,1193 TP8.0@877,1215 ; T1.1@767,1205 T1.1@772,1210
  Bottom Layer w10: T1.1@770,1194 C10.1 R1.2
VFLASH: C32.1 D11.2 P7.5 R52.2 R53.2 U4.2 | length 696.1
  Bottom Layer w20: 1693,464 1639.72,464 U4.2 1741.93,463.93 C32.1 1801,523 R52.2 1801,582 R53.2 1805,669 D11.2 1938.78,701.22 P7.5
XC1: C15.1 U2.37 X2.2 | length 342
  Top Layer w7: U2.37 1522.24,1320.24 X2.2
  Bottom Layer w7: C15.1 X2.2
XC2: C16.1 U2.38 X2.1 | length 327.4
  Top Layer w7: X2.1 1506.49,1355.51 U2.38
  Bottom Layer w7: X2.1 C16.1
XL1: SB1.1 SB2.2 U2.46 | length 353
  Top Layer w7: SB2.2 1176,1405 1179,1408 SB1.1 1218.85,1408 1232.5,1394.35 1232.5,1346.5 1321.28,1257.72 1349.28,1257.72 1380.5,1226.5 U2.46
XL2: SB3.1 SB4.2 U2.45 | length 448.9
  Top Layer w7: SB4.2 1173,1499 1180,1492 SB3.1 ; SB3.1@1202,1491 SB3.1 ; U2.45 1396.25,1230.55 1354.74,1272.06 1327.94,1272.06 1246.5,1353.5 1246.5,1469.5 1224,1492 SB3.1
pads on no net: A1.1 Hole1.1 Hole2.1 Hole3.1 Hole4.1 J1.0 J1.2 J1.3 J1.4 TP1.0@1566,880 TP2.0@669,1550 TP3.0@1190,1290 TP4.0@1717,1730 TP5.0@912,450 TP6.0@1120,975 TP7.0@1167,885 TP8.0@877,1215 U1.4 U4.4 U4.5 U4.6 U4.11 U4.12 U4.13 U4.14 X1.0

## Polygon pours and split planes (outlines as drawn)
GND on Bottom Layer "Top Layer-No Net" (solid, remove dead copper, pour order 4): 0,0 2165.35,0 2165,887 1821,887 1821,1969 0,1968.5
GND on Top Layer "Top Layer-No Net" (solid, remove dead copper, pour order 3): 0,0 2165.35,0 2165,887 1821,887 1821,1969 0,1968.5

## Keep-outs
Keep-Out Layer:
  the board outline again, w10

## Other copper
Top Layer:
  rectangle net GND: 1580.5,1122.19 1815.5,1185
  rectangle net GND: 1644.01,1132 1711,1174.36
  rectangle net GND: 1646,1030.44 1814.86,1077.5
  pour cut-out: 1843.78,1122 1853.63,1112.14 1853.63,1090.14 1840.99,1077.5 1647.61,1077.5 1633.76,1091.34 1633.76,1108.28 1647.49,1122

## Silkscreen, mask and mechanical layers (free items; w line width, h text height)
Top Overlay:
  lines w10: 700,706 700,893 723,916 871,916 883,904 ; 870,795 847,772 847,714 857,704 876,704 ; 1725,1184.5 1725,1215.5 1725,1218.5 1741,1234.5
Bottom Overlay:
  text "EnvMonitor  V1.0a" at 1181,540.5 h60
Mechanical 1:
  the board outline again, w10

## Text inside footprints (layer, text, board x,y; h text height)
P2: Top Overlay "1" at 69,1066.78 h30 r90
P3: Top Overlay "1" at 952,1975 h30
P4: Top Overlay "1" at 7,351.56 h30 r90
P6: Top Overlay "1" at 310.82,1903 h30
P7: Top Overlay "1" at 2060.86,284.26 h30 r90